# Altium PCB Main.PcbDoc
Units mil, origin at the board's own origin, x right, y up, seen from the top; angles counter-clockwise.
Board outline 1395 x 1180 mil, 2 copper layers (Top Layer, Bottom Layer); 22 components, 24 nets, 113 pads, 28 vias.
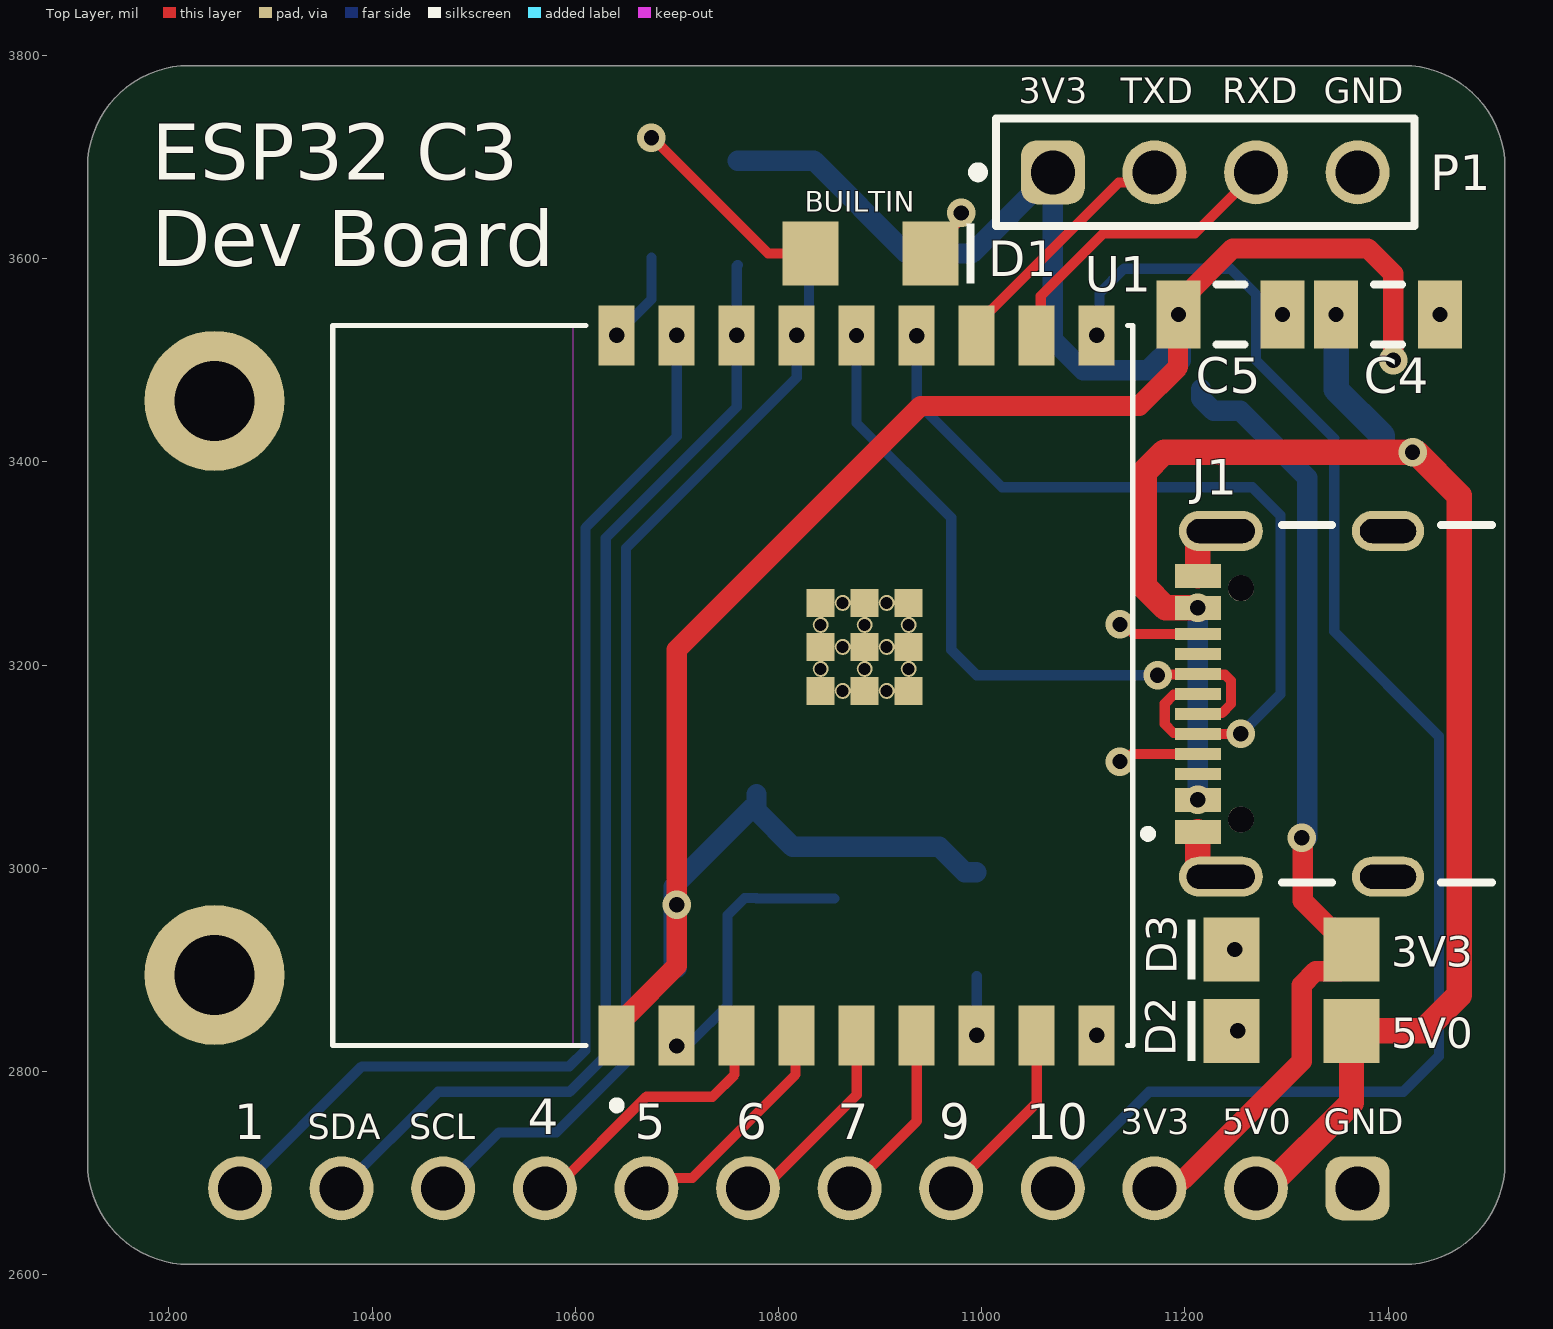
[diagram p0: Top Layer view]
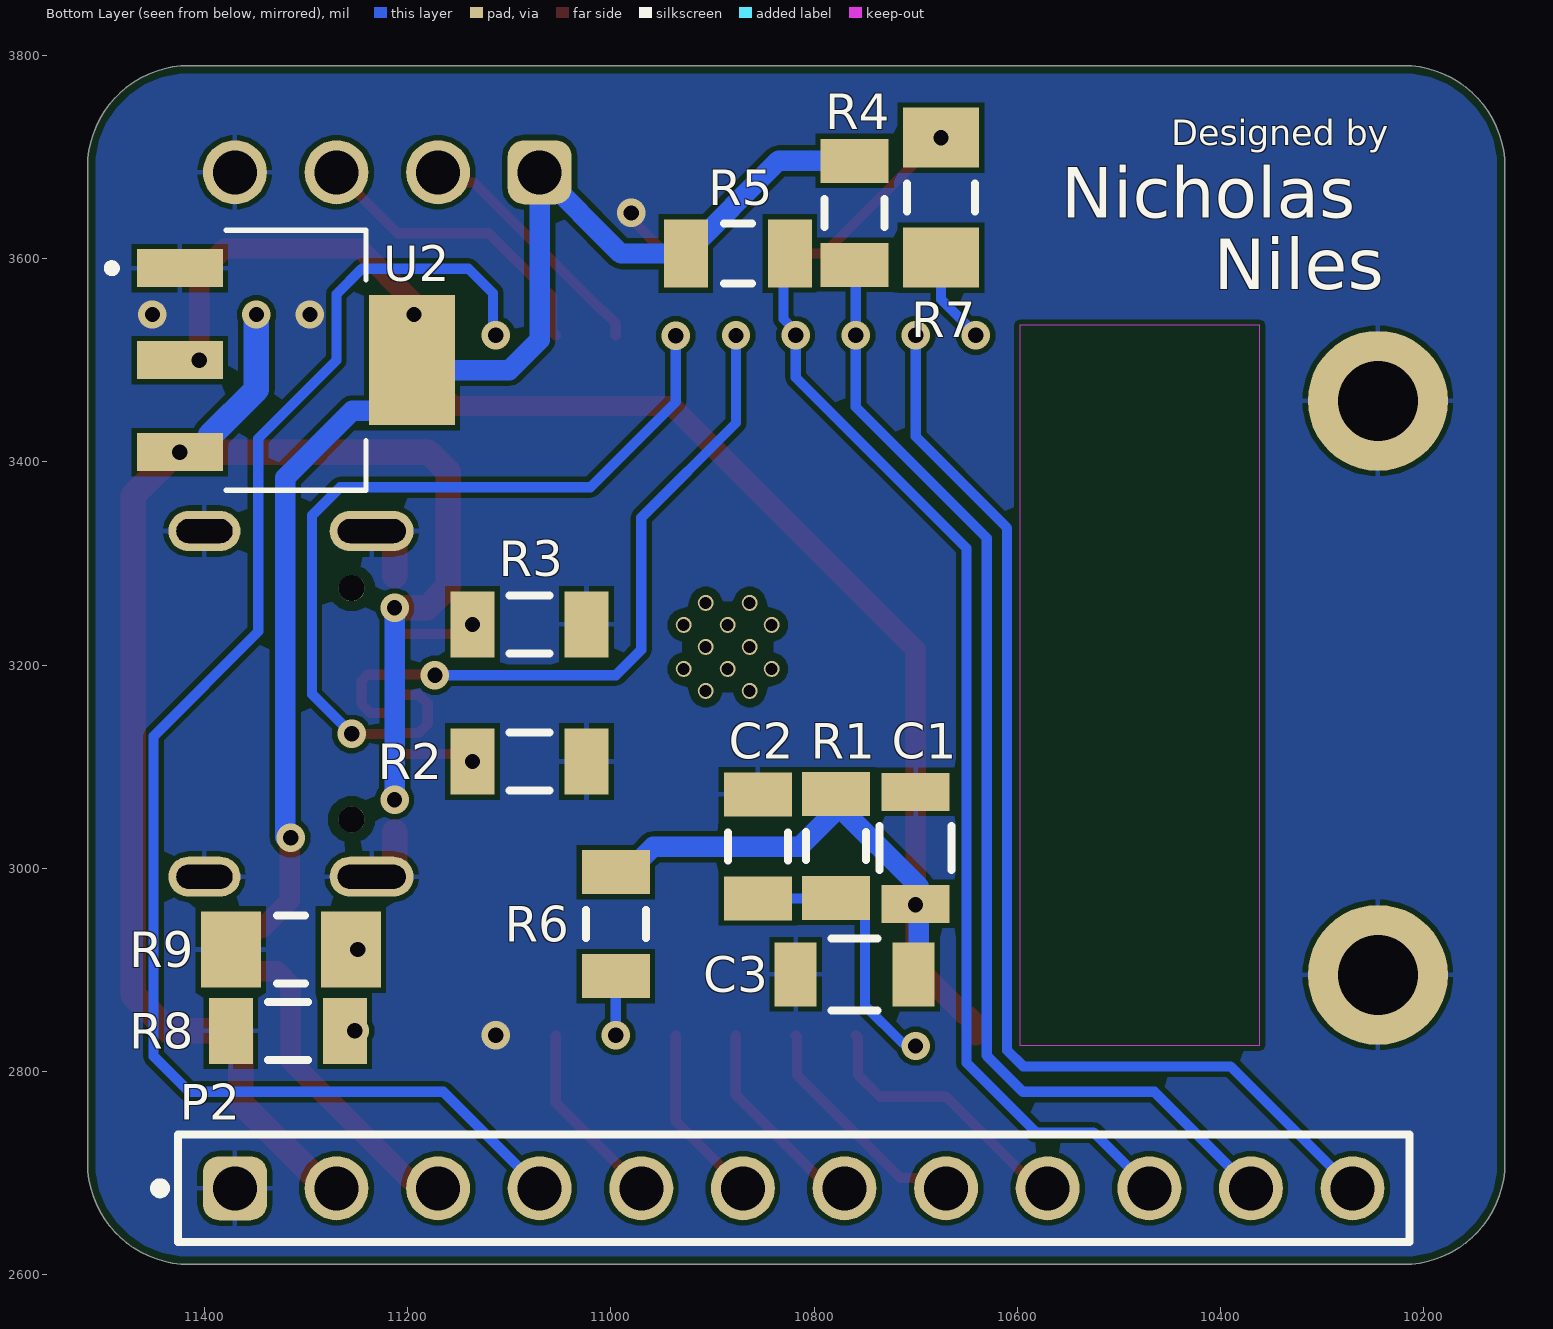
[diagram p1: Bottom Layer view, seen from below]
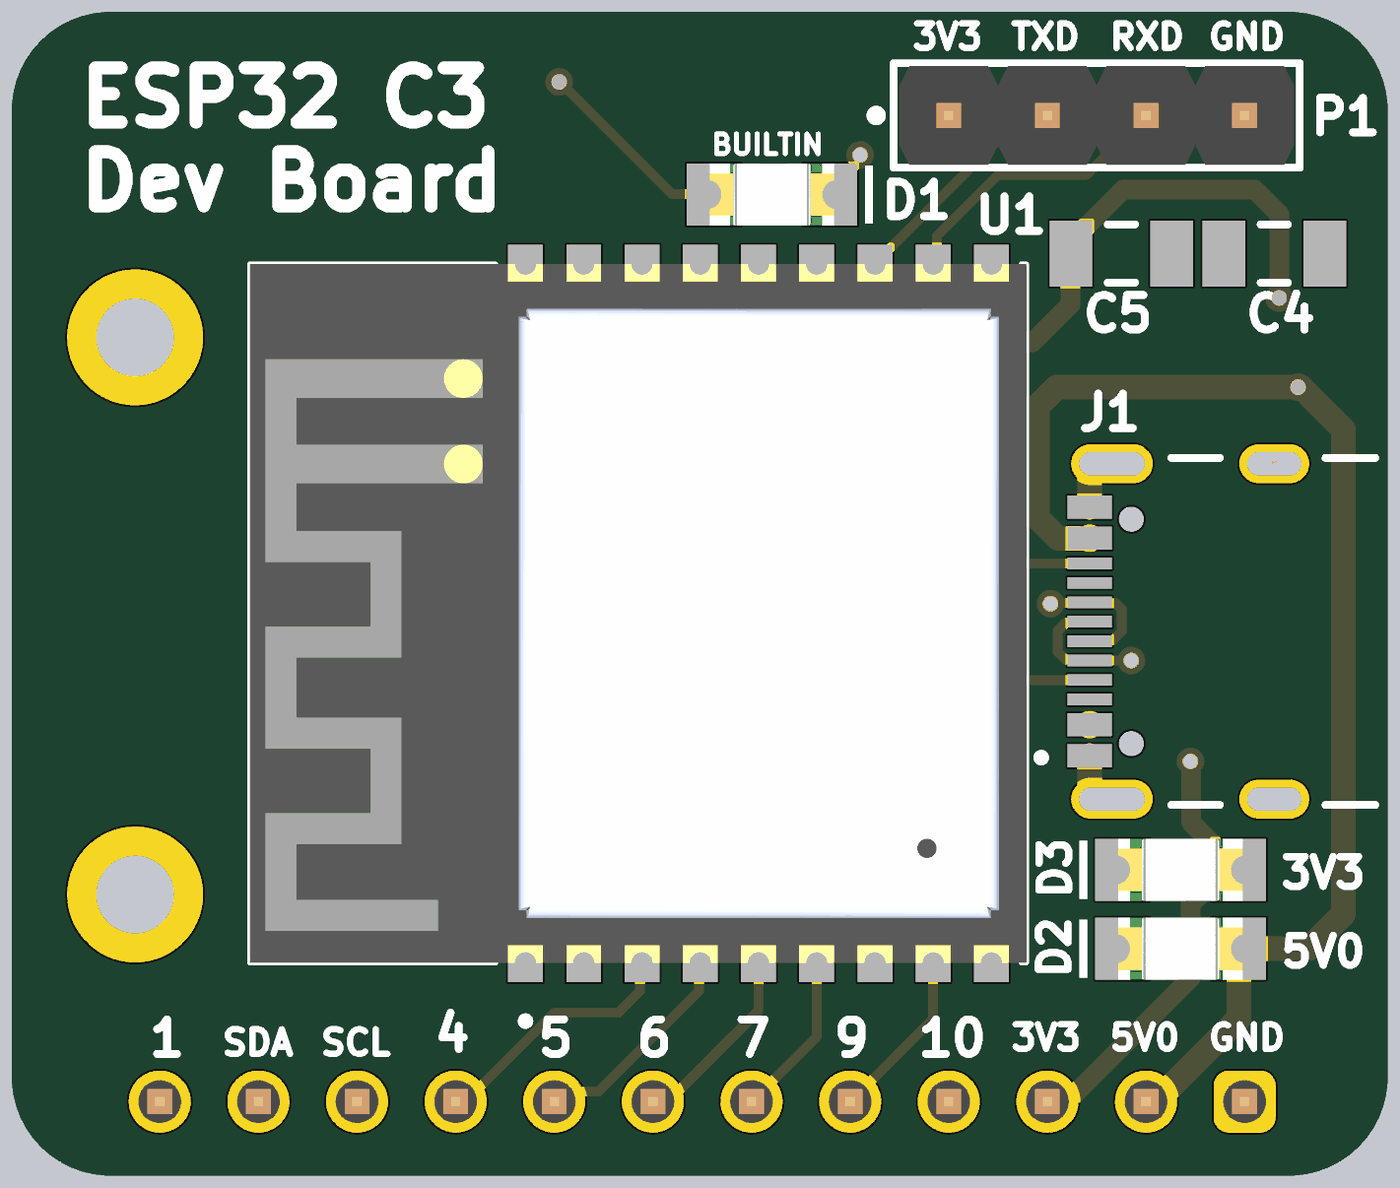
[diagram p2: 3D render of the assembled board from above, using the file's embedded part models]

## Layer stack, top to bottom
Top Solder: solder mask 0.4, Solder Resist, Dk 3.5
Top Layer: signal copper 1.4
Dielectric 1: dielectric 12.6, FR-4, Dk 4.8
Bottom Layer: signal copper 1.4
Bottom Solder: solder mask 0.4, Solder Resist, Dk 3.5

## Board outline
10120,2710 10120,3690 cw(c10220,3690) 10220,3790 11415,3790 cw(c11415,3690) 11515,3690 11515,2710 cw(c11415,2710) 11415,2610 10220,2610 cw(c10220,2710)

## Design rules (kind name [scope] priority, off if disabled: settings)
BoardOutlineClearance [All] p1: gap=7.87 ignorepadtopadclearanceinfootprint=FALSE
Clearance [All] p1: gap=5 ignorepadtopadclearanceinfootprint=TRUE except(10: Arc-Hole Track-Hole SMDPad-Hole THPad-Hole Via-Hole Fill-Hole Poly-Hole Region-Hole Text-Hole)
ComponentClearance [All] p1: gap=5 collisioncheckmode=3 verticalgap=5 showdistances=TRUE
DiffPairsRouting [All] p1: maxlimit=10 minlimit=5 mostfreqgap=5 toplayer_minwidth=5 toplayer_maxwidth=1000 toplayer_prefwidth=5 bottomlayer_minwidth=5 bottomlayer_maxwidth=1000 bottomlayer_prefwidth=5 maxuncoupledlength=500
Height [All] p1: minheight=0 maxheight=71497.94 prefheight=500
HoleSize [All] p1: absolutevalues=TRUE maxlimit=248.03 minlimit=11.81 maxpercent=80.000 minpercent=20.000
HoleToHoleClearance [All] p1: gap=10 allowstackedmicrovias=FALSE
MinimumAnnularRing [All] p1: minimumring=6
MinimumSolderMaskSliver [All] p1: minsoldermaskwidth=6
PlaneClearance [All] p1: clearance=5
PlaneConnect PlaneConnectPowerPads [InPadClass('PowerPads')] p1: planeconnectstyle=Direct reliefexpansion=20 reliefentries=4 reliefconductorwidth=10 reliefairgap=10
PlaneConnect [All] p2: pad.planeconnectstyle=Relief pad.reliefexpansion=11.81 pad.reliefentries=4 pad.reliefconductorwidth=5 pad.reliefairgap=5 via.planeconnectstyle=Direct via.reliefexpansion=11.81 via.reliefentries=4 via.reliefconductorwidth=5 via.reliefairgap=5
PolygonConnect PolygonConnectPowerPads [All vs (InPadClass('PowerPads'))] p1: connectstyle=Direct reliefconductorwidth=10 reliefentries=4 polygonreliefangle="90 Angle" airgapwidth=10
PolygonConnect [All] p2: thpad.connectstyle=Relief thpad.reliefconductorwidth=5 thpad.reliefentries=4 thpad.polygonreliefangle="90 Angle" thpad.airgapwidth=5 smdpad.connectstyle=Relief smdpad.reliefconductorwidth=5 smdpad.reliefentries=4 smdpad.polygonreliefangle="90 Angle" smdpad.airgapwidth=5 via.connectstyle=Direct via.reliefconductorwidth=5 via.reliefentries=4 via.polygonreliefangle="90 Angle" via.airgapwidth=5
RoutingVias [All] p1: holewidth=11.81 width=23.62 viastyle="Through Hole" minholewidth=11.81 minwidth=23.62 maxholewidth=23.62 maxwidth=259.84
SilkToSilkClearance [All] p1: silktosilkclearance=5
SilkToSolderMaskClearance [IsPad] p1: minsilkscreentomaskgap=5 clearancetoexposedcopper=TRUE
SolderMaskExpansion [All] p1: expansion=2 istentingtop=FALSE
SupplyNets "Schematic Supply Nets_2" [InNet('GND')] p1: voltage=0.000
SupplyNets "Schematic Supply Nets_1" [InNet('5V0')] p2: voltage=0.000
SupplyNets "Schematic Supply Nets" [InNet('3V3')] p3: voltage=0.000
UnRoutedNet [All] p1: checkbadconnections=TRUE
Width Width_10mil [All] p1: maxlimit=1000 minlimit=10 preferedwidth=10 minimp=50.000000 maximp=50.000000 favimp=50.000000
Width Width_6mil [All] p2: maxlimit=1000 minlimit=6 preferedwidth=6 minimp=50.000000 maximp=50.000000 favimp=50.000000
Width Power_20mil [All] p3: maxlimit=1000 minlimit=20 preferedwidth=20 minimp=50.000000 maximp=50.000000 favimp=50.000000
Width Power_12mil [All] p4: maxlimit=1000 minlimit=12 preferedwidth=12 minimp=50.000000 maximp=50.000000 favimp=50.000000
Width Width_5mil [All] p5: maxlimit=1000 minlimit=5 preferedwidth=5 minimp=50.000000 maximp=50.000000 favimp=50.000000
19 further rules are at their usual default settings.

## Components (designator, comment, footprint, x,y, rotation, side; value= is the part's Value field where it differs from the comment)
C1 "0.1µF" FP-C1206C-EB-MFG 10700,3020 r90 bottom value="0.10 μF"
C2 "1µF" CAPC3216X110X50LL20T25 10855.26,3021.49 r270 bottom
C3 "10µF" FP-GRM31C-0_2-e0_3_0_8-MFG 10760,2895.63 r0 bottom
C4 "1µF" CAPC3216X110X50LL20T25 11400,3545 r180 top
C5 "1µF" CAPC3216X110X50LL20T25 11245,3545 r180 top
D1 "150120SS75000" WL-SMCW_1206_150120xx75000 10890.66,3604.83 r180 top
D2 "150120GS75000" WL-SMCW_1206_150120xx75000 11305,2840 r0 top
D3 "150120GS75000" WL-SMCW_1206_150120xx75000 11305,2920 r0 top
J1 "USB4105-GF-A" GCT_USB4105-GF-A 11400,3161.79 r90 top locked
P1 "61300411121" 61300411121 11220,3685 r0 top
P2 "61301211121" 61301211121 10820,2685 r180 bottom
R1 "10kΩ" RESC3216X70X50LL20T25 10778.41,3021.72 r270 bottom
R2 "5.1kΩ" RESC3216X70X50NL05T20 11080,3105 r0 bottom
R3 "5.1kΩ" RESC3216X70X50NL05T20 11080,3240 r180 bottom
R4 "10kΩ" RESC3216X70X50LL20T25 10760,3645 r90 bottom
R5 "10kΩ" RESC3216X70X50LL20T25 10875,3605 r0 bottom
R6 "10kΩ" RESC3216X70X50LL20T25 10995,2945 r90 bottom
R7 "220Ω" RESC3216X70X50ML20T25 10675,3660 r90 bottom
R8 "330Ω" RESC3216X70X50NL05T20 11317.95,2840 r0 bottom
R9 "220Ω" RESC3216X70X50ML20T25 11315,2920 r0 bottom
U1 "ESP32-C3-WROOM-02-N4" MODULE_ESP32-C3-WROOM-02-H4 10755,3180 r90 top locked
U2 "TLV1117LV33DCYR" VREG_TLV1117LV33DCYR 11310,3500 r180 bottom

## Footprints (in the part's own frame and the unit in brackets; to place one, negate y for a bottom-side part, rotate by r counter-clockwise, add the part's x,y. Pads: shape width x height; smd on the part's side, far side on the other; paste and mask are expansions set on the pad)
61300411121 [mm] "Pin Header, pitch 2.54 mm, THT, Vertical, single row, 4p"
  rrect50% 1.6x1.6 hole 1.1: 1(-3.81,0)
  round 1.6 hole 1.1: 2(-1.27,0) 3(1.27,0) 4(3.81,0)
  silkscreen extent -5.8,-1.35 5.23,1.35, body extent -5.08,-1.27 5.08,1.27, height 8.57
61301211121 [mm] "Pin Header, pitch 2.54 mm, THT, Vertical, single row, 12p"
  rrect50% 1.6x1.6 hole 1.1: 1(-13.97,0)
  round 1.6 hole 1.1: 2(-11.43,0) 3(-8.89,0) 4(-6.35,0) 5(-3.81,0) 6(-1.27,0) 7(1.27,0) 8(3.81,0) 9(6.35,0) 10(8.89,0) 11(11.43,0) 12(13.97,0)
  silkscreen extent -15.96,-1.35 15.39,1.35, body extent -15.24,-1.27 15.24,1.27, height 8.57
CAPC3216X110X50LL20T25 [mm] "Chip Capacitor, 2-Leads, Body 3.20x1.60mm, IPC High Density"
  rect 1.1x1.7 smd: 1(-1.3,0) 2(1.3,0)
  silkscreen extent -0.35,-0.75 0.35,0.75, body extent -1.7,-0.9 1.7,0.9, height 1.1
FP-C1206C-EB-MFG [mm]
  rect 0.95x1.7 smd paste+0 mask+0: 1(-1.4,0) 2(1.4,0)
  silkscreen extent -0.55,-0.9 0.55,0.9, body extent -1.6,-0.8 1.6,0.8, height 0.88
FP-GRM31C-0_2-e0_3_0_8-MFG [mm]
  rect 1.05x1.6 smd paste+0 mask+0: 1(-1.475,0) 2(1.475,0)
  silkscreen extent -0.58,-0.9 0.58,0.9, body extent -1.6,-0.8 1.6,0.8, height 1.8
GCT_USB4105-GF-A [mm]
  rect 0.6x1.15 smd mask+0.05: A1_B12(-3.2,4.755) A4_B9(-2.4,4.755) B1_A12(3.2,4.755) B4_A9(2.4,4.755)
  rect 0.3x1.15 smd mask+0.05: A5(-1.25,4.755) A6(-0.25,4.755) A7(0.25,4.755) A8(1.25,4.755) B5(1.75,4.755) B6(0.75,4.755) B7(-0.75,4.755) B8(-1.75,4.755)
  oval 1x2.1 hole 0.6 slot 1.7 at 90 deg: SH1(-4.32,4.18) SH2(4.32,4.18)
  oval 1x1.8 hole 0.6 slot 1.4 at 90 deg: SH3(-4.32,0) SH4(4.32,0)
  round 0.65 hole 0.65 unplated: ""(-2.89,3.68) ""(2.89,3.68)
  silkscreen extent -4.47,-2.6 4.47,6.1
MODULE_ESP32-C3-WROOM-02-H4 [mm]
  rect 1.5x0.9 smd: 1(-8.75,2.9) 2(-8.75,1.4) 3(-8.75,-0.1) 4(-8.75,-1.6) 5(-8.75,-3.1) 6(-8.75,-4.6) 7(-8.75,-6.1) 8(-8.75,-7.6) 9(-8.75,-9.1) 10(8.75,-9.1) 11(8.75,-7.6) 12(8.75,-6.1) 13(8.75,-4.6) 14(8.75,-3.1) 15(8.75,-1.6) 16(8.75,-0.1) 17(8.75,1.4) 18(8.75,2.9)
  rect 0.7x0.7 smd: 19(-0.14,-2.2) 20(0.96,-2.2) 21(2.06,-2.2) 22(-0.14,-3.3) 23(0.96,-3.3) 24(2.06,-3.3) 25(-0.14,-4.4) 26(0.96,-4.4) 27(2.06,-4.4)
  round 0.4 hole 0.3 mask+0: 28(0.41,-2.2) 29(1.51,-2.2) 30(-0.14,-2.75) 31(0.96,-2.75) 32(2.06,-2.75) 33(0.41,-3.3) 34(1.51,-3.3) 35(-0.14,-3.85) 36(0.96,-3.85) 37(2.06,-3.85) 38(0.41,-4.4) 39(1.51,-4.4)
  Keep-Out Layer region: 9,4 -9,4 -9,10 9,10
  Keep-Out Layer region: 9,4 -9,4 -9,10 9,10
  silkscreen extent -10.6,-10 9,10, body extent -9,-10 9,10, height 3.35
RESC3216X70X50LL20T25 [mm] "Chip Resistor, 2-Leads, Body 3.20x1.60mm, IPC High Density"
  rect 1.1x1.7 smd: 1(-1.3,0) 2(1.3,0)
  silkscreen extent -0.35,-0.75 0.35,0.75, body extent -1.7,-0.9 1.7,0.9, height 0.7
RESC3216X70X50ML20T25 [mm] "Chip Resistor, 2-Leads, Body 3.20x1.60mm, IPC Low Density"
  rect 1.5x1.9 smd: 1(-1.5,0) 2(1.5,0)
  silkscreen extent -0.35,-0.85 0.35,0.85, body extent -1.7,-0.9 1.7,0.9, height 0.7
RESC3216X70X50NL05T20 [mm] "Chip Resistor, 2-Leads, Body 3.20x1.60mm, IPC Medium Density"
  rect 1.1x1.65 smd: 1(-1.425,0) 2(1.425,0)
  silkscreen extent -0.5,-0.72 0.5,0.72, body extent -1.63,-0.82 1.62,0.82, height 0.7
VREG_TLV1117LV33DCYR [mm]
  rect 2.15x0.95 smd: 1(-2.9,2.3) 2(-2.9,0) 3(-2.9,-2.3)
  rect 2.15x3.25 smd: 4(2.9,0)
  silkscreen extent -4.7,-3.25 1.75,3.25, body extent -3.5,-3.25 3.5,3.25, height 1.8
WL-SMCW_1206_150120xx75000 [mm] "SMD Mono-color Chip LED, body 3.2x1.6mm"
  rect 1.4x1.6 smd: 1(-1.5,0) 2(1.5,0)
  silkscreen extent -2.6,-0.75 -2.4,0.75, body extent -1.6,-0.8 1.6,0.8, height 0.68

## Part data
C1: library part CMP-03020-000153-1, "CAP CER 0.1UF 100V X7R 1206", Capacitance="0.10 μF", Manufacturer=KEMET, Manufacturer Part Number=C1206C104K1RACTU, Package=C1206C-EB, Temperature="-55°C to +150°C", Temperature Characteristic=X7R, Temperature Coefficient=15%, Temperature Range High=+150°C, Temperature Range Low=-55°C, Tolerance=0.1, Voltage Rating="100 V", Automotive=Yes, Automotive Grade="Grade 0", Category=Cap, ComponentLink2Description=Datasheet, ComponentLink2URL=https://content.kemet.com/datasheets/KEM_C1007_X8R_ULTRA_150C_SMD.pdf, Device Class L1="Passive Components", Device Class L2=Capacitors, Device Class L3="Ceramic Capacitors", Digikey Description="CAP CER 0.1UF 100V X7R 1206", Height=0.88mm, Ipc Land Pattern Name=CAPC320160X78, Lead Free=Yes, Material=Ceramic, Mouser Description="CAP CER 0.1UF 100V X7R 1206", Octopart=https://octopart.com/c1206c104k1ractu-kemet-89521, RoHS=TRUE
C2 C4 C5: library part CMP-2000-06011-1, "Chip Capacitor, 1 uF, +/- 10%, 50 V, -55 to 125 degC, 1206 (3216 Metric), RoHS, Tape and Reel", Capacitance=1uF, Capacitance - nF=1000nF, Case Code - in=1206, Case Code - mm=3216, Case Height=1mm, Case Length=3.2mm, Case Width=1.6mm, Dielectric=X7R, Manufacturer=Kemet, Maximum Operating Temperature=+125C, Minimum Operating Temperature=-55C, Operating Temperature Range=-55Cto+125C, Package / Case=1206(3216metric), Package Description="2-Pin Surface Mount Device, Body 3.2 x 1.6 mm", Temperature Coefficient / Code=+/-15%, Tolerance=10%, Voltage Rating=50V, Brand=Kemet, Class=Class1, Datasheet URL=http://www.kemet.com/docfinder?Partnumber=C1206C105K5RACTU, Datasheet Version=02/2016, Dimensions=1.6mmWx3.2mmLx1mmH, Factory Pack Quantity=2500, Manufacturer URL=http://www.kemet.com/, Mounting Technology=SurfaceMount, Package Reference=1206, Packaging=Reel, Product=GeneralTypeMLCCs, Product Category=MultilayerCeramicCapacitorsMLCC-SMD/SMT, RoHS=Details, Series=C1206C, Termination Style=SMD/SMT, Type=SMDMLCCX7R6.3-250VDCCommericalGrade, Voltage Rating DC=50V
C3: library part CMP-06035-003589-1, "Chip Multilayer Ceramic Capacitors for General Purpose, 1206, 10uF, X7R, 15%, 10%, 25V", Capacitance=10uF, Case Code (Imperial)=1206, Case Code (Metric)=3216, Dielectric=X7R, Max Operating Temperature=125°C, Min Operating Temperature=-55°C, Package Quantity=1, Tolerance=10%, Voltage=25V, Case/Package=1206, Depth=1.6mm, Height=1.6mm, Lead Free="Lead Free", Length=3.2mm, Material=Ceramic, Mount="Surface Mount", Number of Pins=2, Packaging="Tape and Reel", Radiation Hardening=No, REACH SVHC="No SVHC", Termination=SMD/SMT, Thickness=0.071inch, Voltage Rating=25V, Voltage Rating (DC)=25V, Width=1.6mm
D1: library part CMP-1426-00017-3, "Led, Red, 630 Nm, 1.9 V, 30 Ma, 60 Mcd Rohs Compliant: Yes", Case Code (Imperial)=1206, Case Code (Metric)=3216, Color=Red, Forward Current=100mA, Forward Voltage=1.9V, Max Operating Temperature=85°C, Max Reverse Voltage (DC)=5V, Min Operating Temperature=-40°C, Test Current=20mA, Case/Package=1206, Dominant Wavelength=630nm, Height=680µm, Length=3.2mm, Lens Style="Clear, Rectangular", Luminous Intensity=60mcd, Mount="Surface Mount", Packaging="Tape and Reel", Peak Wavelength=645nm, REACH SVHC=Unknown, RoHS=Compliant, Viewing Angle=140°, Wavelength=630nm, Width=1.6mm
D2 D3: library part CMP-1426-00014-4, "WL-SMCW SMT Mono-Color Chip LED Waterclear", Case Code (Imperial)=1206, Case Code (Metric)=3216, Color=Green, Forward Current=100mA, Forward Voltage=3.2V, Max Junction Temperature (Tj)=95°C, Max Operating Temperature=85°C, Max Reverse Voltage (DC)=5V, Min Operating Temperature=-40°C, Power Dissipation=105mW, Test Current=20mA, Case/Package=1206, Dominant Wavelength=525nm, Height=680µm, Length=3.2mm, Lens Style="Clear, Rectangular", Luminous Intensity=450mcd, Mount="Surface Mount", Packaging="Tape and Reel", Peak Wavelength=515nm, REACH SVHC=Unknown, Reverse Voltage=5V, RoHS=Compliant, Viewing Angle=140°, Wavelength=525nm, Width=1.6mm
J1: Package=None, Availability=Unavailable, MF="{'manufacturer': u'GCT'}", MP=USB4105-GF-A, Price=None
P1: "WR-PHD Pin Header, THT, Vertical, pitch 2.54mm, 1 Row, 4P", Contact Resistance=20mOhm, Manufacturer="Wurth Elektronik", Operating Temperature Max=105°C, Operating Temperature Min=-40°C, Rated Current=3A, Withstanding Voltage=500V, Working Voltage=250V, Category="Board-to-Board Connectors", ComponentLink1Description="Website Link", ComponentLink1URL=https://www.we-online.com/redexpert/article/61300411121?ad, ComponentLink2Description="Datasheet Link", ComponentLink2URL=https://www.we-online.com/redexpert/spec/61300411121?ad, Gender="Pin Header", Manufacturer Part Number=61300411121, Match Code=WR-PHD, Mount="Through Hole", Number of Pins=4, Number of Rows=1, Orientation=Vertical, Packaging=Bag, Pitch=2.54mm
P2: "WR-PHD Pin Header, THT, Vertical, pitch 2.54mm, 1 Row, 12P", Contact Resistance=20mOhm, Manufacturer="Wurth Elektronik", Operating Temperature Max=105°C, Operating Temperature Min=-40°C, Rated Current=3A, Withstanding Voltage=500V, Working Voltage=250V, Category="Board-to-Board Connectors", ComponentLink1Description="Website Link", ComponentLink1URL=https://www.we-online.com/redexpert/article/61301211121?ad, ComponentLink2Description="Datasheet Link", ComponentLink2URL=https://www.we-online.com/redexpert/spec/61301211121?ad, Gender="Pin Header", Manufacturer Part Number=61301211121, Match Code=WR-PHD, Mount="Through Hole", Number of Pins=12, Number of Rows=1, Orientation=Vertical, Packaging=Bag, Pitch=2.54mm
R1 R4 R5 R6: library part CMP-2003-04407-1, Manufacturer=Panasonic, Part Number=ERA8AEB103V
R2 R3: library part CMP-2003-00853-1, Manufacturer=Panasonic, Part Number=ERJ-8ENF5101V
R7 R9: library part CMP-2003-04438-1, Manufacturer=Panasonic, Part Number=ERA8AEB221V
R8: library part CMP-2003-00612-1, Manufacturer=Panasonic, Part Number=ERJ-8GEYJ331V
U1: "WiFi Modules (802.11) (Engineering Samples) SMD module, ESP32-C3, 4MB SPI flash, PCB antenna, -40 C +85 C", Package=Package, Availability="In Stock", Check_prices=https://www.snapeda.com/parts/ESP32-C3-WROOM-02-N4/Espressif+Systems/view-part/?ref=eda, MF="Espressif Systems", MP=ESP32-C3-WROOM-02-N4, Price=None, Purchase-URL=https://pricing.snapeda.com/search/part/ESP32-C3-WROOM-02-N4/?ref=eda, SnapEDA_Link=https://www.snapeda.com/parts/ESP32-C3-WROOM-02-N4/Espressif+Systems/view-part/?ref=snap
U2: "1-A, low-dropout voltage regulator", Package="SOT-223-4 Texas Instruments", Check_prices=https://www.snapeda.com/parts/TLV1117LV33DCYR/Texas+Instruments/view-part/?ref=eda, Digi-Key_Part_Number=296-28778-2-ND, MF="Texas Instruments", MP=TLV1117LV33DCYR, Purchase-URL=https://pricing.snapeda.com/search/part/TLV1117LV33DCYR/?ref=eda, SnapEDA_Link=https://www.snapeda.com/parts/TLV1117LV33DCYR/Texas+Instruments/view-part/?ref=snap

## Free pads (board coordinates)
  round 137.79 hole 78.74: 7(10245,2895) 7(10245,3460)

## Via types
v1: diameter 28, hole 15, Top Layer to Bottom Layer, tented both sides, 28 vias

## Nets (pads, with @x,y where several pads share a name; then routed paths per layer and width w, separated by ;. In a path a pad name is that pad's centre, name@x,y a point inside that pad or via, vN(x,y) a via of type N, cw(c..) or ccw(c..) an arc to the next point about the centre after c; other vN are vias at no path point)
3V3: C1.1 C3.1 C5.2 D3.2 P1.1 P2.3 R1.1 R4.2 R5.2 R6.2 U1.1 U2.2 U2.4 | length 3565.1
  Top Layer w20: U1.1 10640.83,2847.32 10648.54,2855.04 10650.95,2855.04 10700,2904.09 10700,3215 10940,3455 11155,3455 11193.25,3493.25 11193.25,3544.43 v1(11193.82,3545) 11193.82,3556.81 11247.01,3610 11380,3610 11405,3585 v1(11405,3500) ; P2.3 11178.23,2693.23 11198.23,2693.23 11315,2810 11315,2885 11328.5,2898.5 11352.56,2898.5 D3.2@11371.02,2916.97 ; v1(11315,3030) 11315.96,3029.04 11315.96,2968.1 11342.56,2941.5 11346.5,2941.5 11364.06,2923.94 D3.2
  Bottom Layer w20: C3.1@10696.93,2905 10696.93,2904.68 C3.1@10699.86,2901.75 ; C3.1@10696.93,2910 C1.1@10696.93,2968.39 ; C1.1@10696.93,2969.3 10696.93,2982.08 R1.1@10774.92,3060.08 ; v1(10700,2963.97) C1.1 ; R4.2 10835,3696.18 R5.2 10990,3605 P1.1 11070,3520 11100,3490 11163.5,3490 11188.83,3515.32 U2.4@11188.83,3522.31 ; R1.1 10778.41,3056.59 10813.81,3021.19 10958.18,3021.19 10983.19,2996.18 R6.2 ; U2.4@11193.82,3515.32 v1(11193.82,3545) ; U2.4 U2.4@11195.83,3515.32 ; U2.4@11215.83,3471.72 11215.83,3462.49 11228.15,3450.16 11254.71,3450.16 11320.39,3384.48 11320.39,3030.39 v1@11320,3030
5V0: C4.2 D2.2 J1.A4_B9 J1.B4_A9 P2.2 U2.3 | length 1681.8
  Top Layer w25: v1(11212.8,3256.28) 11180.92,3256.28 11160,3277.2 11160,3390 11179.57,3409.57 11424.06,3409.57 v1(11424.17,3409.45) 11427.44,3409.45 11470,3366.89 11470,2875 11435,2840 D2.2@11374.06,2840 ; P2.2 11280,2685 11364.06,2769.06 D2.2
  Bottom Layer w20: v1(11212.8,3067.3) v1(11212.8,3256.28)
  Bottom Layer w25: v1(11348.82,3545) 11348.82,3471.18 11394.35,3425.65 11394.35,3415.65 11400.55,3409.45 v1(11424.17,3409.45)
D+: J1.A6 J1.B6 U1.14 | length 696.8
  Top Layer w10: v1(11173.14,3189.96) 11173.82,3190.64 11212.12,3190.64 J1.B6 11213.7,3190.41 11239.58,3190.41 11245.43,3184.56 11245.43,3161.59 11236.7,3152.85 11213.7,3152.85 J1.A6
  Bottom Layer w10: v1(10876.78,3524.45) 10876.78,3438.22 10970,3345 10970,3215 10995.04,3189.96 v1(11173.14,3189.96)
D-: J1.A7 J1.B7 U1.13 | length 836.2
  Top Layer w10: J1.A7 11211.89,3170.73 11188.89,3170.73 11180.16,3162 11180.16,3141.9 11188.89,3133.17 11211.89,3133.17 J1.B7 v1(11255.1,3132.28)
  Bottom Layer w10: v1(10936.12,3524.12) 10936.12,3458.88 11020,3375 11266.41,3375 11294,3347.41 11294,3171.19 v1(11255.1,3132.28)
GND: C1.2 C2.1 C3.2 C4.1 C5.1 D1.1 J1.A1_B12 J1.B1_A12 J1.SH1 J1.SH2 J1.SH3 J1.SH4 P1.4 P2.1 pad.7 R2.1 R3.2 R8.2 R9.2 U1.9 U2.1 | length 170.3
  Top Layer w10: D1.1 10949.71,3608.77 10977.13,3636.19 10977.13,3642.13 v1(10980,3645)
  Top Layer w25: J1.A1_B12 11212.8,3005.28 11226.36,2991.71 J1.SH1 ; J1.B1_A12 11212.8,3318.3 11226.36,3331.87 J1.SH2
  other v1: 11113.27,2835.51 11296.18,3545 11451.18,3545
IO0: R7.1 U1.18 | length 90.6
  Bottom Layer w10: v1(10640.83,3524.49) 10640.83,3525.83 10675,3560 R7.1
IO1: P2.12 U1.17 | length 1137.1
  Bottom Layer w10: P2.12 10390,2805 10594.14,2805 10610,2820.86 10610,3335 10699.88,3424.88 v1(10699.88,3524.49)
IO2: P2.11 R4.1 U1.16 | length 1146.2
  Bottom Layer w10: P2.11 10465,2780 10594.45,2780 10630,2815.55 10630,3325 10758.94,3453.94 10758.94,3592.76 R4.1
  other v1: 10758.94,3524.49
IO3: P2.10 R5.1 U1.15 | length 1103.2
  Bottom Layer w10: P2.10@10457.92,2672.92 10525,2740 10581.57,2740 10650,2808.43 10650,3315 10817.99,3482.99 v1(10817.99,3524.49) 10817.99,3528.55 10830,3540.56 R5.1@10830,3588.82
IO4: P2.9 U1.3 | length 272.7
  Top Layer w10: P2.9 10580,2685 10670,2775 10735,2775 10756.84,2796.84 10756.84,2833.42 U1.3
IO5: P2.8 U1.4 | length 232.3
  Top Layer w10: P2.8 10680.14,2695.14 10715.14,2695.14 10816.84,2796.84 10816.84,2834.36 U1.4
IO6: P2.7 U1.5 | length 203.6
  Top Layer w10: P2.7 10785,2685 10877.05,2777.05 U1.5
IO7: P2.6 U1.6 | length 187.6
  Top Layer w10: P2.6@10863.12,2678.12 10936.1,2751.1 U1.6
IO9: P2.5 U1.8 | length 185.4
  Top Layer w10: P2.5 11054.21,2769.21 U1.8
IO10: P2.4 U1.10 | length 1475.3
  Bottom Layer w10: P2.4 11165,2780 11415,2780 11450,2815 11450,3130 11347.07,3232.93 11347.07,3422.93 11270,3500 11270,3565 11245,3590 11140,3590 11116.02,3566.02 11116.02,3527.24 v1(11113.27,3524.49)
NetC2_2: C2.2 R1.2 U1.2 | length 267.4
  Bottom Layer w10: v1(10700,2825) 10703.44,2828.44 10713.44,2828.44 10749.95,2864.95 10749.95,2953.89 10766.6,2970.54 R1.2 ; R1.2@10778.65,2970.31 C2.2
NetD1_2: D1.2 R7.2 | length 203.9
  Top Layer w10: v1@10675,3720 10789.88,3605.12 D1.2@10831.32,3605.12
  other v1: 10675,3719.06
NetD2_1: D2.1 R8.1
  other v1: 11252.01,2840
NetD3_1: D3.1 R9.1
  other v1: 11249.06,2920
NetJ1_A5: J1.A5 R2.2 | length 79.8
  Top Layer w10: v1(11136.1,3105) 11140.16,3105 11147.74,3112.58 J1.A5
NetJ1_B5: J1.B5 R3.1 | length 80.5
  Top Layer w10: v1(11136.1,3240) 11140.16,3240 11149.47,3230.69 J1.B5
NetR6_1: R6.1 U1.7 | length 58.4
  Bottom Layer w10: R6.1 10995.16,2893.66 v1(10995.16,2835.51)
RXD: P1.3 U1.11 | length 302.6
  Top Layer w10: U1.11 11058.16,3528.43 11058.16,3563.16 11120,3625 11210,3625 P1.3
TXD: P1.2 U1.12 | length 248.2
  Top Layer w10: U1.12 10995.16,3536.3 11007.87,3549.02 11009.02,3549.02 11134.86,3674.86 11159.86,3674.86 P1.2
pads on no net: J1. J1.A8 J1.B8 U1.19 U1.20 U1.21 U1.22 U1.23 U1.24 U1.25 U1.26 U1.27 U1.28 U1.29 U1.30 U1.31 U1.32 U1.33 U1.34 U1.35 U1.36 U1.37 U1.38 U1.39

## Polygon pours and split planes (outlines as drawn)
GND on Bottom Layer "GND_L02_P000" (solid, pour order 0): 10095,3810 11530,3810 11530,2585 10095,2585

## Silkscreen, mask and mechanical layers (free items; w line width, h text height)
Top Overlay:
  text "3V3" at 11036.68,3753 h25
  text "TXD" at 11136.68,3753 h25
  text "RXD" at 11236.68,3753 h25
  text "GND" at 11336.68,3753 h25
  text "ESP32 C3" at 10183,3677.51 h55
  text "BUILTIN" at 10826,3646 h20
  text "Dev Board" at 10183,3592.51 h55
  text "3V3" at 11403,2903 h30
  text "5V0" at 11403,2823 h30
  text "4" at 10553.34,2738 h35
  text "3V3" at 11136.68,2738 h25
  text "5V0" at 11236.68,2738 h25
  text "GND" at 11336.68,2738 h25
  text "1" at 10264.17,2733 h35
  text "SDA" at 10336.68,2733 h25
  text "SCL" at 10436.68,2733 h25
  text "5" at 10658.34,2733 h35
  text "6" at 10758.34,2733 h35
  text "7" at 10858.34,2733 h35
  text "9" at 10958.34,2733 h35
  text "10" at 11043.76,2733 h35
Bottom Overlay:
  text "Designed by" at 10448.42,3711.67 h25
  text "Nicholas" at 10556.55,3640.01 h50
  text "Niles" at 10406.6,3570.01 h50
Mechanical 1:
  the board outline again, w10

## Text inside footprints (layer, text, board x,y; h text height)
J1: Top 3D Body "PCB EDGE" at 11498.43,3374.39 h16 r90